# Altium PCB UpperPlumbingBayBoard.PcbDoc
Units mil, origin at the board's own origin, x right, y up, seen from the top; angles counter-clockwise.
Board outline 4300 x 4207 mil, 4 copper layers (Top Layer, GND, PWR, Bottom Layer), stack 62.449 mil thick; 60 components, 42 nets, 244 pads, 0 vias.
Unrouted connection lines stored in the file: 149.
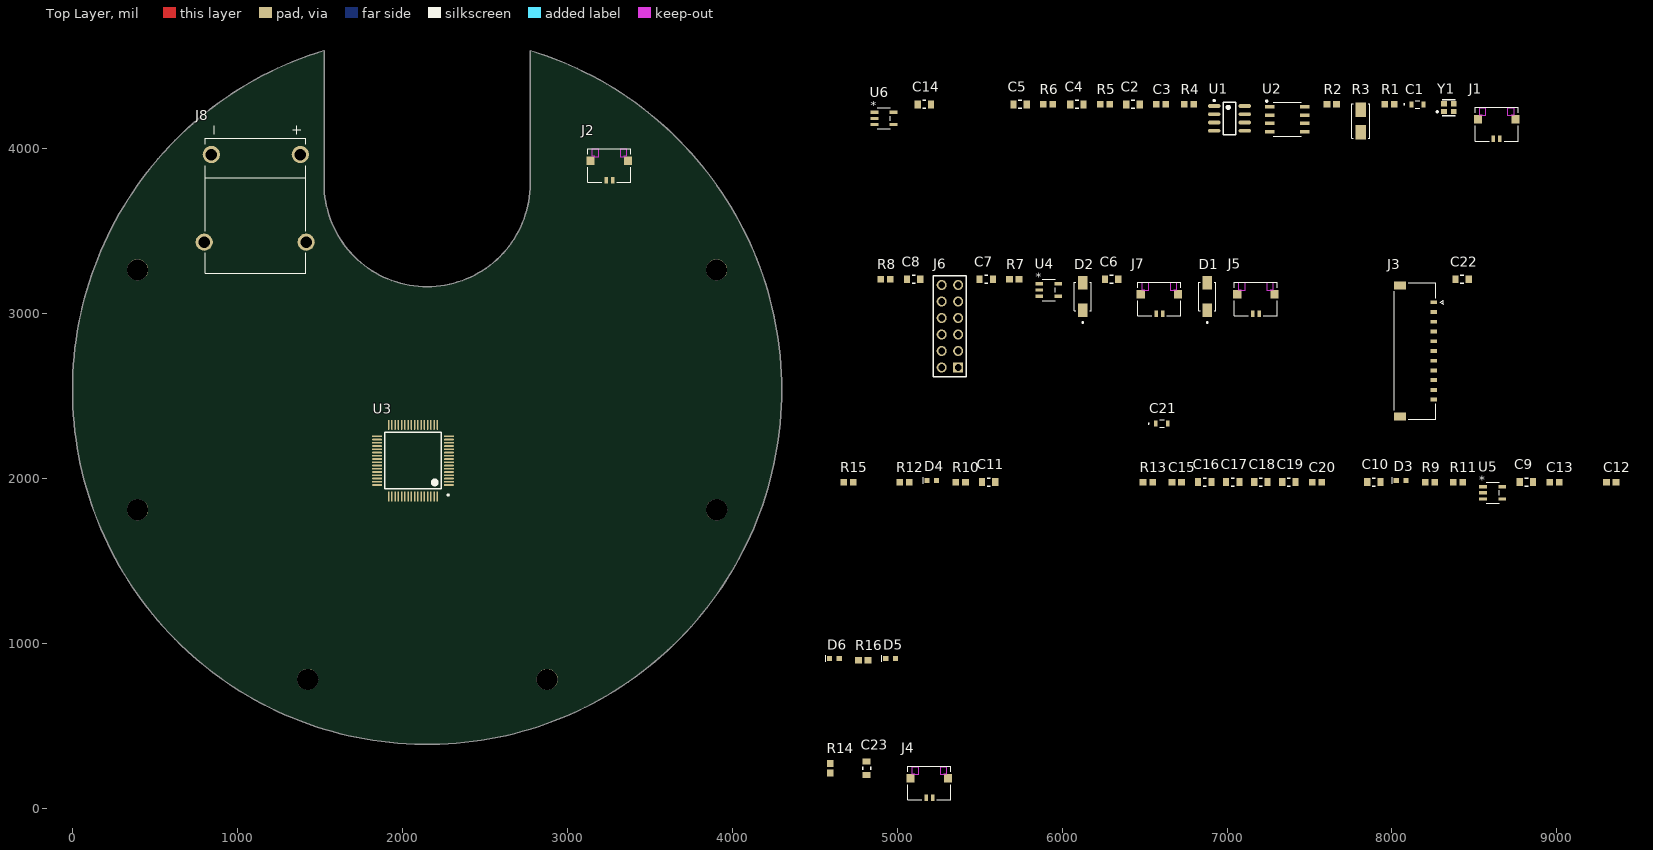
[diagram p0: Top Layer view]
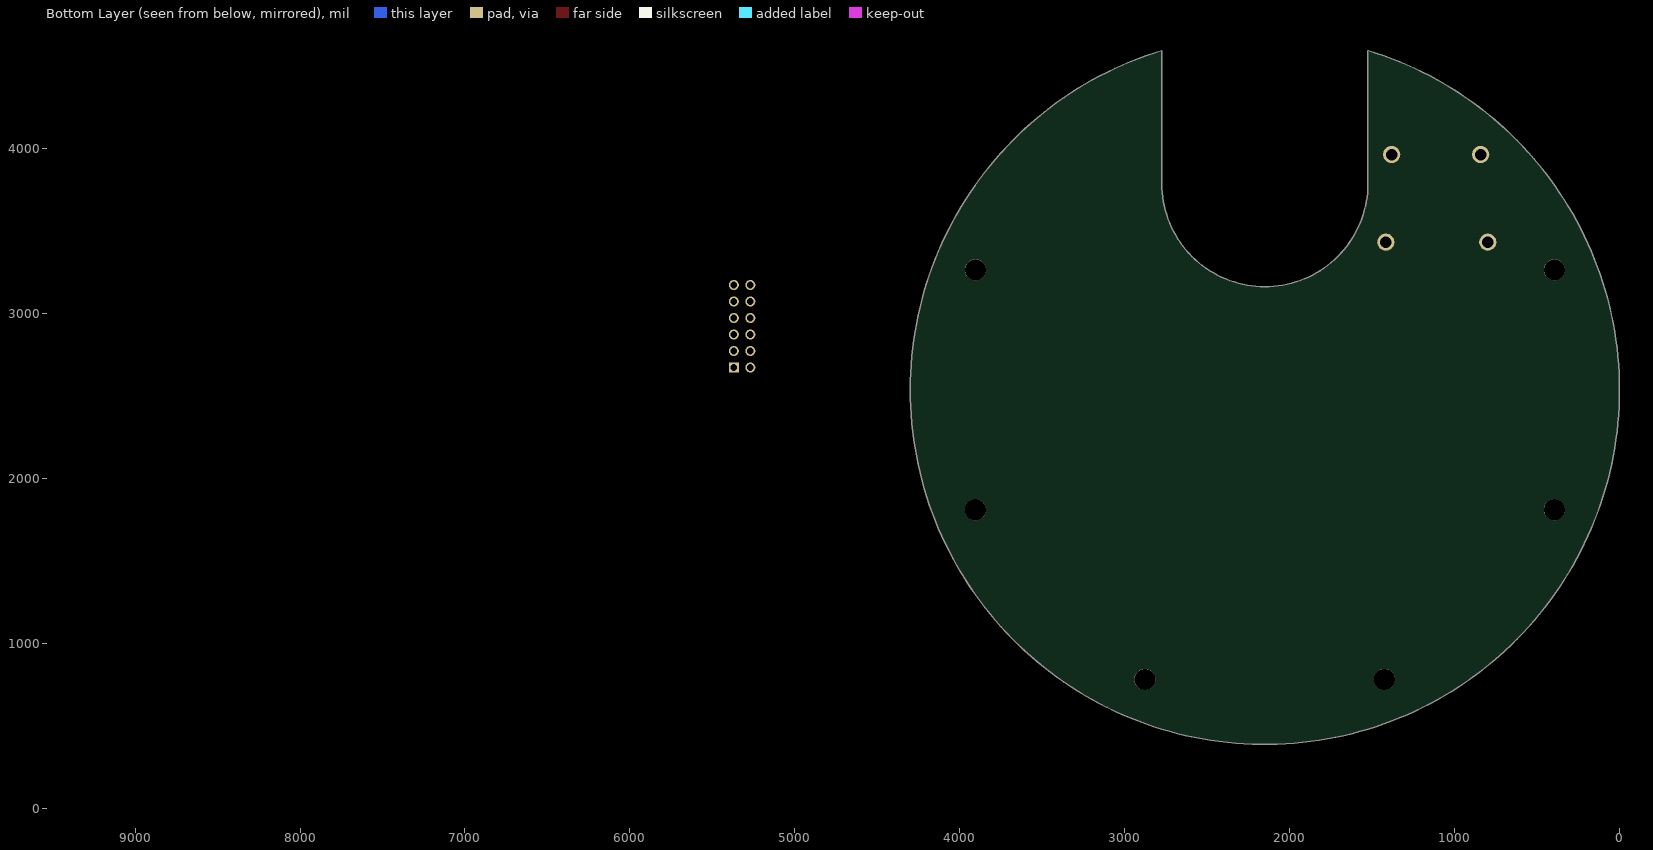
[diagram p1: Bottom Layer view, seen from below]

## Layer stack, top to bottom
Top Solder: solder mask 0.5, Solder Resist, Dk 3.8
Top Layer: signal copper 1.378
Dielectric 1: prepreg 8.2835, 7628, Dk 4.4
GND: signal copper 0.5984
Core: core 41.9291, FR-4, Dk 4.6
PWR: signal copper 0.5984
Dielectric 2: prepreg 8.2835, 7628, Dk 4.4
Bottom Layer: signal copper 1.378
Bottom Solder: solder mask 0.5, Solder Resist, Dk 3.8

## Board outline
1525.5,4596.66 ccw(c2150.5,2539.5) 2775.5,4596.66 2775.5,3789.5 cw(c2150.5,3789.5) 1525.5,3789.5

## Design rules (kind name [scope] priority, off if disabled: settings)
BoardOutlineClearance [All] p1: gap=7.87 ignorepadtopadclearanceinfootprint=FALSE
Clearance [All] p1: gap=7.87 ignorepadtopadclearanceinfootprint=TRUE
ComponentClearance [All] p1: gap=4 collisioncheckmode=3 verticalgap=4 showdistances=TRUE
DiffPairsRouting [All] p1: maxlimit=10 minlimit=10 mostfreqgap=10 toplayer_minwidth=15 toplayer_maxwidth=15 toplayer_prefwidth=15 midlayer1_minwidth=15 midlayer1_maxwidth=15 midlayer1_prefwidth=15 midlayer2_minwidth=15 midlayer2_maxwidth=15 midlayer2_prefwidth=15 bottomlayer_minwidth=15 bottomlayer_maxwidth=15 bottomlayer_prefwidth=15 maxuncoupledlength=500
Height [All] p1: minheight=0 maxheight=71497.94 prefheight=500
HoleSize [All] p1: absolutevalues=TRUE maxlimit=248.03 minlimit=7.87 maxpercent=80.000 minpercent=20.000
HoleToHoleClearance [All] p1: gap=9.84 allowstackedmicrovias=FALSE
MinimumAnnularRing [All] p1: minimumring=3
MinimumSolderMaskSliver [All] p1: minsoldermaskwidth=0
PlaneClearance [All] p1: clearance=4
PlaneConnect PlaneConnectPowerPads [InPadClass('PowerPads')] p1: planeconnectstyle=Direct reliefexpansion=20 reliefentries=4 reliefconductorwidth=10 reliefairgap=10
PlaneConnect [All] p2: pad.planeconnectstyle=Relief pad.reliefexpansion=11.81 pad.reliefentries=4 pad.reliefconductorwidth=4 pad.reliefairgap=4 via.planeconnectstyle=Direct via.reliefexpansion=11.81 via.reliefentries=4 via.reliefconductorwidth=5 via.reliefairgap=5
PolygonConnect Vent_Pwr [InNet('VENT_PWR')] p1: thpad.connectstyle=Relief thpad.reliefconductorwidth=10 thpad.reliefentries=4 thpad.polygonreliefangle="90 Angle" thpad.airgapwidth=10 smdpad.connectstyle=Relief smdpad.reliefconductorwidth=10 smdpad.reliefentries=4 smdpad.polygonreliefangle="90 Angle" smdpad.airgapwidth=10 via.connectstyle=Direct via.reliefconductorwidth=10 via.reliefentries=4 via.polygonreliefangle="90 Angle" via.airgapwidth=10
PolygonConnect "Top Layer 5V" [InNet('+5V')] p2: thpad.connectstyle=Relief thpad.reliefconductorwidth=10 thpad.reliefentries=4 thpad.polygonreliefangle="90 Angle" thpad.airgapwidth=10 smdpad.connectstyle=Relief smdpad.reliefconductorwidth=10 smdpad.reliefentries=4 smdpad.polygonreliefangle="90 Angle" smdpad.airgapwidth=10 via.connectstyle=Direct via.reliefconductorwidth=10 via.reliefentries=4 via.polygonreliefangle="90 Angle" via.airgapwidth=10
PolygonConnect ServoPower [InNet('SERVO_PWR')] p3: thpad.connectstyle=Relief thpad.reliefconductorwidth=10 thpad.reliefentries=4 thpad.polygonreliefangle="90 Angle" thpad.airgapwidth=10 smdpad.connectstyle=Relief smdpad.reliefconductorwidth=10 smdpad.reliefentries=4 smdpad.polygonreliefangle="90 Angle" smdpad.airgapwidth=10 via.connectstyle=Direct via.reliefconductorwidth=10 via.reliefentries=4 via.polygonreliefangle="90 Angle" via.airgapwidth=10
PolygonConnect VentPower [InNet('VENT_PWR')] p4: thpad.connectstyle=Direct thpad.reliefconductorwidth=10 thpad.reliefentries=4 thpad.polygonreliefangle="90 Angle" thpad.airgapwidth=10 smdpad.connectstyle=Relief smdpad.reliefconductorwidth=10 smdpad.reliefentries=4 smdpad.polygonreliefangle="90 Angle" smdpad.airgapwidth=10 via.connectstyle=Direct via.reliefconductorwidth=10 via.reliefentries=4 via.polygonreliefangle="90 Angle" via.airgapwidth=10
PolygonConnect Power12V [InNet('+12')] p5: thpad.connectstyle=Relief thpad.reliefconductorwidth=10 thpad.reliefentries=4 thpad.polygonreliefangle="90 Angle" thpad.airgapwidth=10 smdpad.connectstyle=Relief smdpad.reliefconductorwidth=10 smdpad.reliefentries=4 smdpad.polygonreliefangle="90 Angle" smdpad.airgapwidth=10 via.connectstyle=Direct via.reliefconductorwidth=10 via.reliefentries=4 via.polygonreliefangle="90 Angle" via.airgapwidth=10
PolygonConnect DrainPower [InNet('DRAIN_PWR')] p6: thpad.connectstyle=Relief thpad.reliefconductorwidth=10 thpad.reliefentries=4 thpad.polygonreliefangle="90 Angle" thpad.airgapwidth=10 smdpad.connectstyle=Relief smdpad.reliefconductorwidth=10 smdpad.reliefentries=4 smdpad.polygonreliefangle="90 Angle" smdpad.airgapwidth=10 via.connectstyle=Direct via.reliefconductorwidth=10 via.reliefentries=4 via.polygonreliefangle="90 Angle" via.airgapwidth=10
PolygonConnect Servo12V [InNet('SERVO_12V')] p7: thpad.connectstyle=Relief thpad.reliefconductorwidth=10 thpad.reliefentries=4 thpad.polygonreliefangle="90 Angle" thpad.airgapwidth=10 smdpad.connectstyle=Relief smdpad.reliefconductorwidth=10 smdpad.reliefentries=4 smdpad.polygonreliefangle="90 Angle" smdpad.airgapwidth=10 via.connectstyle=Direct via.reliefconductorwidth=10 via.reliefentries=4 via.polygonreliefangle="90 Angle" via.airgapwidth=10
PolygonConnect PowerConnectionServo [InNet('SERVO_12V')] p8: connectstyle=Relief reliefconductorwidth=10 reliefentries=4 polygonreliefangle="90 Angle" airgapwidth=10
PolygonConnect PowerConnectionGND [InNet('GND')] p9: thpad.connectstyle=Relief thpad.reliefconductorwidth=10 thpad.reliefentries=4 thpad.polygonreliefangle="90 Angle" thpad.airgapwidth=10 smdpad.connectstyle=Relief smdpad.reliefconductorwidth=10 smdpad.reliefentries=4 smdpad.polygonreliefangle="90 Angle" smdpad.airgapwidth=10 via.connectstyle=Direct via.reliefconductorwidth=10 via.reliefentries=4 via.polygonreliefangle="90 Angle" via.airgapwidth=10
PolygonConnect PowerConnection5V [InNet('+5V')] p10: connectstyle=Relief reliefconductorwidth=10 reliefentries=4 polygonreliefangle="90 Angle" airgapwidth=10
PolygonConnect TOP_3V3 [InNet('+3V3')] p11: thpad.connectstyle=Relief thpad.reliefconductorwidth=10 thpad.reliefentries=4 thpad.polygonreliefangle="90 Angle" thpad.airgapwidth=10 smdpad.connectstyle=Relief smdpad.reliefconductorwidth=10 smdpad.reliefentries=4 smdpad.polygonreliefangle="90 Angle" smdpad.airgapwidth=7.87 via.connectstyle=Direct via.reliefconductorwidth=10 via.reliefentries=4 via.polygonreliefangle="90 Angle" via.airgapwidth=10
PolygonConnect Oscillator [InNet('NetC6_2')] p12: thpad.connectstyle=Relief thpad.reliefconductorwidth=10 thpad.reliefentries=4 thpad.polygonreliefangle="90 Angle" thpad.airgapwidth=10 smdpad.connectstyle=Relief smdpad.reliefconductorwidth=10 smdpad.reliefentries=4 smdpad.polygonreliefangle="90 Angle" smdpad.airgapwidth=10 via.connectstyle=Direct via.reliefconductorwidth=10 via.reliefentries=4 via.polygonreliefangle="90 Angle" via.airgapwidth=10
RoutingVias [All] p1: holewidth=11.81 width=23.62 viastyle="Through Hole" minholewidth=7.87 minwidth=17.72 maxholewidth=248.03 maxwidth=257.87
SilkToSilkClearance [All] p1: silktosilkclearance=0
SilkToSolderMaskClearance [IsPad] p1: minsilkscreentomaskgap=4 clearancetoexposedcopper=TRUE
SolderMaskExpansion [All] p1: expansion=2.95 istentingtop=FALSE
SupplyNets "Schematic Supply Nets_2" [InNet('+12')] p1: voltage=0.000
SupplyNets "Schematic Supply Nets_1" [InNet('GND')] p2: voltage=0.000
SupplyNets "Schematic Supply Nets" [InNet('+3V3')] p3: voltage=0.000
UnRoutedNet [All] p1: checkbadconnections=TRUE
Width [All] p1: maxlimit=39.37 minlimit=7.87 preferedwidth=11.81 minimp=50.000000 maximp=50.000000 favimp=50.000000
19 further rules are at their usual default settings.

## Classes and differential pairs
component class UpperPlumbingBayBoardSchematic: C1 C2 C3 C4 C5 C6 C7 C9 C12 C14 C15 C16 C17 C18 C19 C20 C21 C23 D1 D2 J1 J2 J4 J5 J6 J8 R1 R2 R3 R4 R5 R6 R7 R8 R11 R13 R15 R16 U1 U2 U3 U6 Y1
differential pair TX: +TX_P -TX_N
differential pair RX: +RX_P -RX_N

## Components (designator, comment, footprint, x,y, rotation, side; value= is the part's Value field where it differs from the comment)
C1 "CGA3E2X7R1H103K080AA" 10000pF-CAP_1608_TDK 8155,4270 r0 top
C2 "CGA3E2X7R1E104K080AA" 0.1uF-FP-CGA3E-0_3-0_1-IPC_A 6430,4270 r0 top
C3 "CL10A105KP8NNNC" 0603 6600,4270 r0 top
C4 "CGA3E2X7R1E104K080AA" 0.1uF-FP-CGA3E-0_3-0_1-IPC_A 6090,4270 r0 top
C5 "CGA3E2X7R1E104K080AA" 0.1uF-FP-CGA3E-0_3-0_1-IPC_A 5745,4270 r0 top
C6 "CGA3E2X7R1E104K080AA" 0.1uF-FP-CGA3E-0_3-0_1-IPC_A 6300,3210 r0 top
C7 "CC0603KPX7R9BB332" 0.1uF-FP-CGA3E-0_3-0_1-IPC_A 5540,3210 r0 top
C8 "CGA3E2X7R1E104K080AA" 0.1uF-FP-CGA3E-0_3-0_1-IPC_A 5100,3210 r0 top
C9 "CGA3E2X7R1E104K080AA" 0.1uF-FP-CGA3E-0_3-0_1-IPC_A 8815,1980 r0 top
C10 "CC0603KPX7R9BB332" 0.1uF-FP-CGA3E-0_3-0_1-IPC_A 7890,1980 r0 top
C11 "CGA3E2X7R1E104K080AA" 0.1uF-FP-CGA3E-0_3-0_1-IPC_A 5555,1980 r0 top
C12 "C1608X5R1C225K080AB" 0603 9330,1980 r0 top
C13 "C1608X5R1C225K080AB" 0603 8985,1980 r0 top
C14 "CGA3E2X7R1E104K080AA" 0.1uF-FP-CGA3E-0_3-0_1-IPC_A 5165,4270 r0 top
C15 "CL10A106MP8NNNC" 0603 6695,1980 r0 top
C16 "CGA3E2X7R1E104K080AA" 0.1uF-FP-CGA3E-0_3-0_1-IPC_A 6865,1980 r0 top
C17 "CGA3E2X7R1E104K080AA" 0.1uF-FP-CGA3E-0_3-0_1-IPC_A 7035,1980 r0 top
C18 "CGA3E2X7R1E104K080AA" 0.1uF-FP-CGA3E-0_3-0_1-IPC_A 7205,1980 r0 top
C19 "CGA3E2X7R1E104K080AA" 0.1uF-FP-CGA3E-0_3-0_1-IPC_A 7375,1980 r0 top
C20 "CL10A105KP8NNNC" 0603 7545,1980 r0 top
C21 "CGA3E2X7R1H103K080AA" 10000pF-CAP_1608_TDK 6605,2335 r0 top
C22 "CC0603KPX7R9BB332" 0.1uF-FP-CGA3E-0_3-0_1-IPC_A 8425,3210 r0 top
C23 "CGA3E2X7R1E104K080AA" 0.1uF-FP-CGA3E-0_3-0_1-IPC_A 4815,245 r90 top
D1 "SS14" DIOM4325X250N 6880,3105 r90 top
D2 "SS14" DIOM4325X250N 6125,3105 r90 top
D3 "LTST-C191KGKT" LTST-C191KGKT 8055,1990 r0 top
D4 "LTST-C191KGKT" LTST-C191KGKT 5210,1990 r0 top
D5 "LTST-C191KGKT" LTST-C191KGKT 4960,910 r0 top
D6 "LTST-C191KGKT" LTST-C191KGKT 4620,910 r0 top
J1 "5037630291" 2MOLEX_5037630291 8635,4150 r0 top
J2 "5037630291" 2MOLEX_5037630291 3255,3900 r0 top
J3 "5040501191" MOLEX_5040501191 8140,2775 r90 top (schematic designator J6)
J4 "5037630291" 2MOLEX_5037630291 5195,155 r0 top
J5 "5037630291" 2MOLEX_5037630291 7175,3090 r0 top
J6 "TSW-106-07-G-D" SMTC-TSW-106-07-X-D 5370,2675 r90 top (schematic designator J7)
J7 "5037630291" 2MOLEX_5037630291 6590,3090 r0 top
J8 "PCC-SMP-K-5" OMEGA_PCC-SMP-K-5 1110,3655 r270 top
R1 "0603 10 kOhm" 0603 7985,4270 r0 top
R2 "ERJ-3EKF38R3V" 0603 7635,4270 r0 top
R3 "PWR2010W5R00JE" BO_PWR2010 7810,4170 r90 top
R4 "90R" 0603 6770,4270 r0 top
R5 "0R" 0603 6260,4270 r0 top
R6 "0R" 0603 5915,4270 r0 top
R7 "15 Ohm" 0603 5710,3210 r0 top
R8 "ERA-3AED1650V" 0603 4930,3210 r0 top
R9 "15 Ohm" 0603 8230,1980 r0 top
R10 "ERA-3AED1650V" 0603 5385,1980 r0 top
R11 "RC0603FR-071KL" 0603 8400,1980 r0 top
R12 "15 Ohm" 0603 5045,1980 r0 top
R13 "RC0603FR-071KL" 0603 6520,1980 r0 top
R14 "ERA-3AED1650V" 0603 4595,245 r90 top
R15 "330 Ohm" 0603 4705,1980 r0 top
R16 "RC0603FR-071KL" 0603 4795,900 r0 top
U1 "MAX31855KASA+T" MAXM-S8+4_L 7015,4185 r0 top
U2 "SN65HVD1477DR" D8_TEX 7365,4180 r0 top
U3 "STM32F405RGT6" STM-LQFP64_L 2065,2110 r180 top
U4 "TSZ181ILT" SOT23-5_STM-M 5920,3145 r0 top
U5 "TSZ181ILT" SOT23-5_STM-M 8610,1915 r0 top
U6 "TSZ181ILT" SOT23-5_STM-M 4920,4185 r0 top
Y1 "SIT8920BM-73-33N-8.000000" FP-SIT8920BM-73-33N-8_000-MFG 8345,4250 r0 top

## Footprints (in the part's own frame and the unit in brackets; to place one, negate y for a bottom-side part, rotate by r counter-clockwise, add the part's x,y. Pads: shape width x height; smd on the part's side, far side on the other; paste and mask are expansions set on the pad)
0.1uF-FP-CGA3E-0_3-0_1-IPC_A [mm]
  rect 0.956x1.206 smd paste+0 mask+0: 1(-1.025,0) 2(1.025,0)
  silkscreen extent -0.25,-0.6 0.25,0.6, body extent -2,-1.1 2,1.1, height 0.25
2MOLEX_5037630291 [mm]
  rect 0.55x1 smd mask+0.076: 1(0.5,-2.265) 2(-0.5,-2.265)
  rect 1.26x1.3 smd mask+0.076: S1(2.875,0.725) S2(-2.875,0.725)
  Top Layer keep-out region: 2.605,1.38 2.24,1.38 2.24,1.295 1.735,1.295 1.735,2.545 2.605,2.545
  Top Layer keep-out region: -1.735,1.295 -2.24,1.295 -2.24,1.38 -2.605,1.38 -2.605,2.545 -1.735,2.545
  silkscreen extent -3.3,-2.6 3.3,2.6, body extent -3.3,-2.59 3.3,2.6, height 1.42
0603 [mm]
  rect 1.04x1.02 smd: 1(-0.735,0) 2(0.735,0)
  body extent -0.8,-0.4 0.8,0.4, height 0.55
10000pF-CAP_1608_TDK [mil]
  rect 22x35 smd paste+0 mask+0: 1(-36.5,0) 2(36.5,0)
  silkscreen extent -83,-22 13,22, body extent -34,-17 34,17, height 35
BO_PWR2010 [mm]
  rect 2.25x1.651 smd paste+0 mask+0: 1(-1.73,0) 2(1.73,0)
  silkscreen extent -2.67,-1.4 2.67,1.4, body extent -2.54,-1.27 2.54,1.27, height 3.25
D8_TEX [mil]
  rect 57.5x22 smd paste+0 mask+0: 1(-107.25,75) 2(-107.25,25) 3(-107.25,-25) 4(-107.25,-75) 5(107.25,-75) 6(107.25,-25) 7(107.25,25) 8(107.25,75)
  silkscreen extent -130,-104 84,115, body extent -122,-99 122,99, height 69
DIOM4325X250N [mm]
  rect 2.12x1.5 smd: A(2.115,0) C(-2.115,0)
  silkscreen extent -4.1,-1.28 2.16,1.28, body extent -2.57,-1.29 2.57,1.27, height 2.5
FP-SIT8920BM-73-33N-8_000-MFG [mm]
  rect 0.9x0.8 smd paste+0 mask+0: 1(-0.75,-0.6) 2(0.75,-0.6) 3(0.75,0.6) 4(-0.75,0.6)
  silkscreen extent -1.92,-1.25 1,1.25, body extent -1.3,-1.1 1.3,1.1, height 0.25
LTST-C191KGKT [mm] "Green 571nm LED Indication - Discrete 2V 0603"
  rect 0.8x0.8 smd paste-3 mask+0.05: 1(-0.75,0) 2(0.75,0)
  silkscreen extent -1.35,-0.5 -1.35,0.5, body extent -0.8,-0.4 0.8,0.4, height 0.8
MAXM-S8+4_L [mm] "SOIC, 8-Leads, Body 4.9x3.9mm, Pitch 1.27mm, IPC High Density"
  oval 1.9x0.6 smd: U1(-2.35,1.905) U2(-2.35,0.635) U3(-2.35,-0.635) U4(-2.35,-1.905) U5(2.35,-1.905) U6(2.35,-0.635) U7(2.35,0.635) U8(2.35,1.905)
  silkscreen extent -2.47,-2.5 1,2.88, body extent -2,-2.5 2,2.5, height 1.75
MOLEX_5040501191 [mm]
  rect 0.6x1 smd mask+0.076: 1(7.5,-2.87) 2(6,-2.87) 3(4.5,-2.87) 4(3,-2.87) 5(1.5,-2.87) 6(0,-2.87) 7(-1.5,-2.87) 8(-3,-2.87) 9(-4.5,-2.87) 10(-6,-2.87) 11(-7.5,-2.87)
  rect 1.25x1.8 smd mask+0.076: S1(10.105,2.32) S2(-10.105,2.32)
  silkscreen extent -10.53,-4.37 10.53,3.22, body extent -10.53,-3.22 10.53,3.22, height 2
OMEGA_PCC-SMP-K-5 [mm]
  round 2.655 hole 1.77: N(-7.9,-6.8) P(-7.9,6.9) S1(5.6,7.8) S2(5.6,-7.9)
  silkscreen extent -12.33,-7.75 10.4,7.75, body extent -10.4,-8.05 10.4,8.05, height 6.6
SMTC-TSW-106-07-X-D [mm] ".025 SQ Post Terminal Strip Assembly, 2x6 Pins, Vertical, 2.54mm Pitch, Male"
  rect 1.55x1.55 hole 1.02: 1(0,0)
  round 1.55 hole 1.02: 2(0,2.54) 3(2.54,0) 4(2.54,2.54) 5(5.08,0) 6(5.08,2.54) 7(7.62,0) 8(7.62,2.54) 9(10.16,0) 10(10.16,2.54) 11(12.7,0) 12(12.7,2.54)
  silkscreen extent -1.46,-1.27 14.16,3.81, body extent -1.27,-1.27 13.97,3.81, height 8.38
SOT23-5_STM-M [mil]
  rect 46.5x20 smd paste+0 mask+0: 1(-57.75,37.4) 2(-57.75,0) 3(-57.75,-37.4) 4(57.75,-37.4) 5(57.75,37.4)
  silkscreen extent -40,-64 40,64, body extent -59,-59 59,59, height 57
STM-LQFP64_L [mm] "Thin QFP, 64-Leads, Body 10x10mm, Pitch 0.5mm, IPC High Density"
  oval 1.55x0.25 smd: 1(-5.525,3.75) 2(-5.525,3.25) 3(-5.525,2.75) 4(-5.525,2.25) 5(-5.525,1.75) 6(-5.525,1.25) 7(-5.525,0.75) 8(-5.525,0.25) 9(-5.525,-0.25) 10(-5.525,-0.75) 11(-5.525,-1.25) 12(-5.525,-1.75) 13(-5.525,-2.25) 14(-5.525,-2.75) 15(-5.525,-3.25) 16(-5.525,-3.75) 33(5.525,-3.75) 34(5.525,-3.25) 35(5.525,-2.75) 36(5.525,-2.25) 37(5.525,-1.75) 38(5.525,-1.25) 39(5.525,-0.75) 40(5.525,-0.25) 41(5.525,0.25) 42(5.525,0.75) 43(5.525,1.25) 44(5.525,1.75) 45(5.525,2.25) 46(5.525,2.75) 47(5.525,3.25) 48(5.525,3.75)
  oval 0.25x1.55 smd: 17(-3.75,-5.525) 18(-3.25,-5.525) 19(-2.75,-5.525) 20(-2.25,-5.525) 21(-1.75,-5.525) 22(-1.25,-5.525) 23(-0.75,-5.525) 24(-0.25,-5.525) 25(0.25,-5.525) 26(0.75,-5.525) 27(1.25,-5.525) 28(1.75,-5.525) 29(2.25,-5.525) 30(2.75,-5.525) 31(3.25,-5.525) 32(3.75,-5.525) 49(3.75,5.525) 50(3.25,5.525) 51(2.75,5.525) 52(2.25,5.525) 53(1.75,5.525) 54(1.25,5.525) 55(0.75,5.525) 56(0.25,5.525) 57(-0.25,5.525) 58(-0.75,5.525) 59(-1.25,5.525) 60(-1.75,5.525) 61(-2.25,5.525) 62(-2.75,5.525) 63(-3.25,5.525) 64(-3.75,5.525)
  silkscreen extent -5.54,-4.35 4.35,5.41, body extent -5,-5 5,5, height 1.6

## Part data
C1 C21: "CAP CER 10000PF 50V X7R 0603", Capacitance=10000pF, Manufacturer="TDK Corporation", Operating Temperature="-55°C ~ 125°C", Package / Case="0603 (1608 Metric)", Supplier Part Number 1=445-5662-1-ND, Temperature Coefficient=X7R, Tolerance=±10%, Voltage - Rated=50V, ComponentLink1description=Datasheet, ComponentLink1URL=https://product.tdk.com/info/en/catalog/spec/mlccspec_automotive_general_en.pdf, Manufacturer Part Number=CGA3E2X7R1H103K080AA, Mounting Type="Surface Mount, MLCC", Size / Dimension="0.063\" L x 0.031\" W (1.60mm x 0.80mm)", Supplier 1=Digi-Key, Thickness (Max)="0.035\" (0.90mm)"
C2 C4 C5 C6 C8 C9 C11 C14 C16 C17 C18 C19 C23: "CAP CER 0.1UF 25V X7R 0603", Capacitance=0.1µF, Manufacturer="TDK Corporation", Operating Temperature="-55°C ~ 125°C", Package / Case="0603 (1608 Metric)", Supplier Part Number 1=445-5667-1-ND, Temperature Coefficient=X7R, Tolerance=±10%, Voltage - Rated=25V, ComponentLink1description=Datasheet, ComponentLink1URL=https://product.tdk.com/info/en/catalog/spec/mlccspec_automotive_general_en.pdf, Manufacturer Part Number=CGA3E2X7R1E104K080AA, Mounting Type="Surface Mount, MLCC", Size / Dimension="0.063\" L x 0.031\" W (1.60mm x 0.80mm)", Supplier 1=Digi-Key, Thickness (Max)="0.035\" (0.90mm)"
C3 C20: "CAP CER 1UF 10V X5R 0603", Capacitance=1uF, Manufacturer="Samsung Electro-Mechanics", Operating Temperature="-55°C ~ 85°C", Package / Case="0603 (1608 Metric)", Supplier Part Number 1=1276-1182-1-ND, Temperature Coefficient=X5R, Tolerance=±10%, Voltage - Rated=10V, ComponentLink1description=Datasheet, ComponentLink1URL=http://www.samsungsem.com/kr/support/product-search/mlcc/__icsFiles/afieldfile/2019/05/10/19-CL10A105KP8NNNC.pdf, Manufacturer Part Number=CL10A105KP8NNNC, Mounting Type="Surface Mount, MLCC", Size / Dimension="0.063\" L x 0.031\" W (1.60mm x 0.80mm)", Supplier 1=Digi-Key, Thickness (Max)="0.035\" (0.90mm)"
C7 C10 C22: library part CGA3E2X7R1E104K080AA, "CAP CER 0.1UF 25V X7R 0603", Capacitance=0.1µF, Manufacturer="TDK Corporation", Operating Temperature="-55°C ~ 125°C", Package / Case="0603 (1608 Metric)", Supplier Part Number 1=445-5667-1-ND, Temperature Coefficient=X7R, Tolerance=±10%, Voltage - Rated=25V, ComponentLink1description=Datasheet, ComponentLink1URL=https://product.tdk.com/info/en/catalog/spec/mlccspec_automotive_general_en.pdf, Manufacturer Part Number=CGA3E2X7R1E104K080AA, Mounting Type="Surface Mount, MLCC", Size / Dimension="0.063\" L x 0.031\" W (1.60mm x 0.80mm)", Supplier 1=Digi-Key, Thickness (Max)="0.035\" (0.90mm)"
C12 C13: "CAP CER 2.2UF 16V X5R 0603", Capacitance=2.2uF, Manufacturer="TDK Corporation", Operating Temperature="-55°C ~ 85°C", Package / Case="0603 (1608 Metric)", Supplier Part Number 1=445-5157-1-ND, Temperature Coefficient=X5R, Tolerance=±10%, Voltage - Rated=16V, ComponentLink1description=Datasheet, ComponentLink1URL=https://product.tdk.com/info/en/catalog/spec/mlccspec_commercial_general_midvoltage_en.pdf, Manufacturer Part Number=C1608X5R1C225K080AB, Mounting Type="Surface Mount, MLCC", Size / Dimension="0.063\" L x 0.031\" W (1.60mm x 0.80mm)", Supplier 1=Digi-Key, Thickness (Max)="0.035\" (0.90mm)"
C15: "CAP CER 10UF 10V X5R 0603", Capacitance=10µF, Manufacturer="Samsung Electro-Mechanics", Operating Temperature="-55°C ~ 85°C", Package / Case="0603 (1608 Metric)", Supplier Part Number 1=1276-1871-1-ND, Temperature Coefficient=X5R, Tolerance=±20%, Voltage - Rated=10V, ComponentLink1description=Datasheet, ComponentLink1URL=https://static6.arrow.com/aropdfconversion/f91a1722e2705c3d73cfb1979021b64ae4055093/19-cl10a106mp8nnnc.pdf, Manufacturer Part Number=CL10A106MP8NNNC, Mounting Type="Surface Mount, MLCC", Size / Dimension="0.063\" L x 0.031\" W (1.60mm x 0.80mm)", Supplier 1=Digi-Key, Thickness (Max)="0.035\" (0.90mm)"
D1 D2 J1 J2 J3 J4 J5 J7: Package=None, Availability=Unavailable, Price=None
  D1 D2: MP=SS14
  J1 J2 J4 J5 J7: MP=5037630291
  J3: MP=5040501191
D3 D4 D5 D6: "LED,  LTST-C191KGKT", Case Code (Imperial)=0603, Case Code (Metric)=1608, Color=Green, Forward Voltage=2V, Lens Color=Colorless, Manufacturer="Vishay Lite-On", Max Operating Temperature=85°C, Max Power Dissipation=75mW, Min Operating Temperature=-55°C, Test Current=20mA, Case/Package=0603, Category=Uncategorized, ComponentLink1description=https://datasheet.ciiva.com/2109/ltst-c191kgkt-2109973.pdf?src-supplier=Digi-Key, ComponentLink1URL=https://datasheet.ciiva.com/2109/ltst-c191kgkt-2109973.pdf?src-supplier=Digi-Key, Dominant Wavelength=571nm, Height=0.65mm, Lead Free="Lead Free", Length=1.6mm, Lens Size=0.8mm, Lens Style=Flat,Rectangular,Colorless, Lens Transparency=Clear, Luminous Intensity=35mcd, Manufacturer Part Number=LTST-C191KGKT, Mount="Surface Mount", Number of LEDs=1, Number of Pins=2, Packaging="Tape and Reel", Pricing="1=0.223, 10=0.1424, 25=0.1365, 100=0.0663, 250=0.0656, 500=0.0612, 1000=0.0451, 2000=0.0464, 3000=0.0448, 5000=0.0403, 10000=0.0363, 25000=0.0323, 50000=0.0316 (USD)", RoHS=Yes, RoHS Compliant=Yes, Series=-, Stock=3111, Supplier 1="Arrow Electronics", Supplier Part Number 1=LTST-C191KGKT, Viewing Angle=130°, Wavelength=574nm, Width=0.8mm
J6: library part SMTC-TSW-106-07-X-D_1, "0.025\" SQ Post Header, Through-hole, Vertical, -55 to 125 degC, 2.54 mm Pitch, 12-Pin, Male, RoHS", Manufacturer=Samtec, Temperature Range="-55 to 125 degC", ComponentLink1description="Manufacturer URL", ComponentLink1URL=http://www.samtec.com, ComponentLink2description=Datasheet, ComponentLink2URL=http://www.samtec.com/documents/webfiles/pdf/TSW_TH.PDF, ComponentLink3Description="Package Specification", ComponentLink3URL=http://www.samtec.com/documents/webfiles/cpdf/TSW-XXX-XX-XXX-X-XX-XXX-MKT.pdf, DatasheetVersion=F-214, Mounting Technology=Through-hole, Orientation=Vertical, PackageDescription=".025[0.64] SQ. Post Terminal Strip Assembly", PackageReference=TSW-106-07-X-D, PackageVersion="DM, 8/1988", PartNumber=TSW-106-07-G-D, Pitch="2.54 mm", RoHS=True
J8: "Thermocouple Conn, K Type, Rcpt, Pk 5", Package=None, Availability="No availability data", Check_prices=https://www.snapeda.com/parts/PCC-SMP-K-5/Omega%20Engineering/view-part/2886965/?ref=eda, MF="Omega Engineering", MP=PCC-SMP-K-5, Price=None, SnapEDA_Link=https://www.snapeda.com/parts/PCC-SMP-K-5/Omega%20Engineering/view-part/2886965/?ref=snap
R1: library part ERJ-3GEYJ103V, "ERJ-3GEYJ103V /  / SMD Chip Resistor, 10 kOhm, ï¿½ 5%, 100 mW, 0603 [1608 Metric], Thick Film, General Purpose", Manufacturer="Panasonic Electronic Components", Operating Temperature="-55°C ~ 155°C", Package="0603 (1608 Metric)", Power  (W)=0.1W, Resistance=10K, Supplier Part Number 1=P10KGCT-ND, Temperature Coefficient=±200ppm/°C, Tolerance=±5%, ComponentLink1description=Datasheet, ComponentLink1URL=https://industrial.panasonic.com/cdbs/www-data/pdf/RDA0000/DMA0000COL11.pdf, ComponentLink2description="Land Pattern", ComponentLink2URL=https://industrial.panasonic.com/cdbs/www-data/pdf/RDA0000/DMA0000COL17.pdf, Composition="Thick Film", Manufacturer Part Number=ERJ-3GEYJ103V, Supplier 1=Digi-Key
R2: "Res Thick Film 0603 38.3 Ohm 1% 1/10W ±100ppm/°C Molded SMD Punched Carrier T/R", Case Code (Imperial)=0603, Case Code (Metric)=1608, Manufacturer=Panasonic, Max Operating Temperature=155°C, Max Power Dissipation=100mW, Min Operating Temperature=-55°C, Package Quantity=1, Resistance=38.3R, Resistance Tolerance=1%, Resistor Type="Thick Film", Supplier Part Number 1=01AC1806, Temperature Coefficient=100ppm/°C, Voltage Rating=75V, Voltage Rating (DC)=50V, Case/Package=0603, Category="Chip SMD Resistors", ComponentLink1description=https://datasheet.ciiva.com/22760/1678782-22760701.pdf?src-supplier=Farnell, ComponentLink1URL=https://datasheet.ciiva.com/22760/1678782-22760701.pdf?src-supplier=Farnell, ComponentLink2description=https://datasheet.ciiva.com/22741/1678782-22741961.pdf?src-supplier=Element14, ComponentLink2URL=https://datasheet.ciiva.com/22741/1678782-22741961.pdf?src-supplier=Element14, ComponentLink3Description=https://datasheet.ciiva.com/24165/aoa0000ce2-24165276.pdf?src-supplier=Mouser, ComponentLink3URL=https://datasheet.ciiva.com/24165/aoa0000ce2-24165276.pdf?src-supplier=Mouser, Construction=Rectangular, Contact Plating=Tin, Depth=0.8mm, Features="Automotive AEC-Q200", Height=0.022inch, Lead Free="Lead Free", Length=0.063inch, Manufacturer Part Number=ERJ-3EKF38R3V, Military Standard=Not, Mount="Surface Mount", Number of Terminations=2, Packaging="Tape and Reel", Power Rating=100mW, Pricing="10=0.04200, 25=0.03500, 50=0.02700, 100=0.01800 (CAD)", Reach SVHC Compliant=Yes, RoHS=Yes, RoHS Compliant=Yes, Series=ERJ, Stock=83770, Supplier 1=Newark, Termination=SMD/SMT, Tolerance=1%, Weight=7.1E-05oz, Width=0.8mm
R3: "Res Wirewound 2010 5 Ohm 5% 1/2W ±50ppm/°C Molded SMD SMD T/R", Case Code (Imperial)=2010, Case Code (Metric)=5025, Manufacturer=Bourns, Max Operating Temperature=155°C, Max Power Dissipation=500mW, Min Operating Temperature=-55°C, Package Quantity=1, Resistance=5R, Resistance Tolerance=5%, Resistor Type=Wirewound, Supplier Part Number 1=05R8093, Temperature Coefficient=50ppm/°C, Threshold Voltage=1.6V, Case/Package=2010, Category="Chip SMD Resistors", ComponentLink1description=https://datasheet.ciiva.com/7986/1727932-7986277.pdf?src-supplier=Element14, ComponentLink1URL=https://datasheet.ciiva.com/7986/1727932-7986277.pdf?src-supplier=Element14, ComponentLink2description=https://datasheet.ciiva.com/22713/1727932-22713400.pdf?src-supplier=Element14, ComponentLink2URL=https://datasheet.ciiva.com/22713/1727932-22713400.pdf?src-supplier=Element14, ComponentLink3Description=https://datasheet.ciiva.com/9122/pwr2010-9122735.pdf?src-supplier=Avnet, ComponentLink3URL=https://datasheet.ciiva.com/9122/pwr2010-9122735.pdf?src-supplier=Avnet, ComponentLink4Description=https://datasheet.ciiva.com/15865/pwr2010-15865624.pdf?src-supplier=Onlinecomponents.com, ComponentLink4URL=https://datasheet.ciiva.com/15865/pwr2010-15865624.pdf?src-supplier=Onlinecomponents.com, ComponentLink5Description=https://datasheet.ciiva.com/2484/pwr2010-2484257.pdf?src-supplier=Digi-Key, ComponentLink5URL=https://datasheet.ciiva.com/2484/pwr2010-2484257.pdf?src-supplier=Digi-Key, ComponentLink6Description=https://datasheet.ciiva.com/2484/pwr2010-2484258.pdf?src-supplier=Digi-Key, ComponentLink6URL=https://datasheet.ciiva.com/2484/pwr2010-2484258.pdf?src-supplier=Digi-Key, ComponentLink7Description=https://datasheet.ciiva.com/2484/pwr2010-2484256.pdf?src-supplier=Digi-Key, ComponentLink7URL=https://datasheet.ciiva.com/2484/pwr2010-2484256.pdf?src-supplier=Digi-Key, Depth=2.54mm, Height=0.148inch, Length=0.2inch, Manufacturer Part Number=PWR2010W5R00JE, Military Standard=Not, Mount="Surface Mount", Number of Pins=2, Number of Terminations=2, Packaging="Cut Tape", Power Rating=500mW, Pricing="1=0.68700, 10=0.68700, 25=0.68700, 50=0.68700, 100=0.68700, 250=0.68700 (CAD)", Reach SVHC Compliant=Yes, RoHS=Yes, Series=PWR2010, Stock=26, Supplier 1=Newark, Technology="WIRE WOUND", Termination=Solder, Tolerance=5%, Width=0.1inch
R4: library part 120OHM_0.1W_RES_1, "RC0603FR-0790RL / 90 Ohm 1/10W 1% Thick Film General Purpose 0603 Chip Resistor", Manufacturer=Panasonic, Part Number=ERJ-3GEYJ121V
R5 R6: library part RT-0R00-F-1/10W-0603, "RC0603JR-070RL /  / RES SMD 0 OHM 1% JUMPER 1/10W 0603", Manufacturer="Stackpole Electronics Inc", Manufacturer Part #=RMCF0603ZT0R00, ComponentLink1description=Datasheet, ComponentLink1URL=https://industrial.panasonic.com/ww/products/resistors/chip-resistors/general-purpose-chip-resistors/models/ERJ2GE0R00X, ComponentLink2description="Manufacturer Website", ComponentLink2URL=https://industrial.panasonic.com/ww/products/resistors/chip-resistors/general-purpose-chip-resistors/models/ERJ2GE0R00X, Distributor=Digikey, Distributor Part #=RMCF0603ZT0R00CT-ND, Part Description="0 Ohms Jumper 0.1W, 1/10W Chip Resistor 0603 (1608 Metric) Automotive AEC-Q200 Thick Film"
R7 R9 R12: library part CRGCQ0402J330R, "RC0603FR-1015RL / Res Thick Film 0603 15 Ohm 1% 0.1W(1/10W) ±100ppm/C Molded SMD Paper T/R", Case Code (Imperial)=0402, Case Code (Metric)=1005, Manufacturer="TE Connectivity", Max Operating Temperature=155°C, Max Power Dissipation=63mW, Min Operating Temperature=-55°C, Ratings=AEC-Q200, Resistance=15R, Temperature Coefficient=100ppm/°C, Tolerance=5%, Case/Package=0402, Category="Chip SMD Resistors", ComponentLink1description=https://4donline.ihs.com/images/VipMasterIC/IC/TYEL/TYEL-S-A0004929575/TYEL-S-A0004929575-1.pdf?hkey=52A5661711E402568146F3353EA87419&src-supplier=Newark, ComponentLink1URL=https://4donline.ihs.com/images/VipMasterIC/IC/TYEL/TYEL-S-A0004929575/TYEL-S-A0004929575-1.pdf?hkey=52A5661711E402568146F3353EA87419&src-supplier=Newark, ComponentLink2description=https://www.te.com/commerce/DocumentDelivery/DDEController?Action=srchrtrv&amp;DocNm=1773204-3&amp;DocType=DS&amp;DocLang=English&src-supplier=Digi-Key, ComponentLink2URL=https://www.te.com/commerce/DocumentDelivery/DDEController?Action=srchrtrv&amp;DocNm=1773204-3&amp;DocType=DS&amp;DocLang=English&src-supplier=Digi-Key, ComponentLink3Description=https://4donline.ihs.com/images/VipMasterIC/IC/TYEL/TYEL-S-A0004929575/TYEL-S-A0004929575-1.pdf?hkey=52A5661711E402568146F3353EA87419&src-supplier=Farnell, ComponentLink3URL=https://4donline.ihs.com/images/VipMasterIC/IC/TYEL/TYEL-S-A0004929575/TYEL-S-A0004929575-1.pdf?hkey=52A5661711E402568146F3353EA87419&src-supplier=Farnell, Features="Moisture Resistant,Automotive AEC-Q200", Manufacturer Part Number=CRGCQ0402J330R, Number of Terminations=2, Packaging="Cut Tape", Pricing="1=0.0576, 10=0.0086, 100=0.0034, 250=0.0033, 500=0.0032, 1000=0.0018, 3000=0.0017, 6000=0.0016, 15000=0.0015 (USD)", RoHS=Yes, RoHS Compliant=Yes, Series=CRGCQ, Stock=20410, Supplier 1="Arrow Electronics", Supplier Part Number 1=CRGCQ0402J330R
R8 R10 R14: library part ERJ-3GEYJ103V, "ERA-3AED1650V / Res Thin Film 0603 165 Ohm 0.5% 1/10W 25ppm/C Molded SMD SMD Punched Carrier T/R", Manufacturer="Panasonic Electronic Components", Operating Temperature="-55°C ~ 155°C", Package="0603 (1608 Metric)", Power  (W)=0.1W, Resistance=165R, Supplier Part Number 1=P10KGCT-ND, Temperature Coefficient=±200ppm/°C, Tolerance=±5%, ComponentLink1description=Datasheet, ComponentLink1URL=https://industrial.panasonic.com/cdbs/www-data/pdf/RDA0000/DMA0000COL11.pdf, ComponentLink2description="Land Pattern", ComponentLink2URL=https://industrial.panasonic.com/cdbs/www-data/pdf/RDA0000/DMA0000COL17.pdf, Composition="Thick Film", Manufacturer Part Number=ERJ-3GEYJ103V, Supplier 1=Digi-Key
R11 R13 R16: "Res Thick Film 0603 1K Ohm 1% 1/10W ±100ppm/°C Molded SMD SMD Paper T/R", Case Code (Imperial)=0603, Case Code (Metric)=1608, Manufacturer=Yageo, Max Operating Temperature=155°C, Max Power Dissipation=100mW, Min Operating Temperature=-55°C, Resistance=1kR, Resistance Tolerance=1%, Resistor Type="Thick Film", Supplier Part Number 1=4016291, Temperature Coefficient=100ppm/°C, Voltage Rating=50V, Case/Package=0603, Category="Chip SMD Resistors", ComponentLink1description=https://datasheet.ciiva.com/11808/0900766b80f96399-11808081.pdf?src-supplier=Rs, ComponentLink1URL=https://datasheet.ciiva.com/11808/0900766b80f96399-11808081.pdf?src-supplier=Rs, ComponentLink2description=https://datasheet.ciiva.com/7746/1686128-7746280.pdf?src-supplier=Element14, ComponentLink2URL=https://datasheet.ciiva.com/7746/1686128-7746280.pdf?src-supplier=Element14, ComponentLink3Description=https://datasheet.ciiva.com/7660/1868787-7660790.pdf?src-supplier=Element14, ComponentLink3URL=https://datasheet.ciiva.com/7660/1868787-7660790.pdf?src-supplier=Element14, ComponentLink4Description=https://datasheet.ciiva.com/7983/443971-7983613.pdf?src-supplier=Element14, ComponentLink4URL=https://datasheet.ciiva.com/7983/443971-7983613.pdf?src-supplier=Element14, ComponentLink5Description=https://datasheet.ciiva.com/7746/1738695-7746281.pdf?src-supplier=Element14, ComponentLink5URL=https://datasheet.ciiva.com/7746/1738695-7746281.pdf?src-supplier=Element14, ComponentLink6Description=https://datasheet.ciiva.com/7746/1738695-7746279.pdf?src-supplier=Element14, ComponentLink6URL=https://datasheet.ciiva.com/7746/1738695-7746279.pdf?src-supplier=Element14, ComponentLink7Description=https://datasheet.ciiva.com/8896/pyu-rc0603-51-rohs-l-4-8896106.pdf?src-supplier=Avnet, ComponentLink7URL=https://datasheet.ciiva.com/8896/pyu-rc0603-51-rohs-l-4-8896106.pdf?src-supplier=Avnet, ComponentLink8Description=https://datasheet.ciiva.com/15189/getdatasheetpartid-404327-15189644.pdf?src-supplier=Verical, ComponentLink8URL=https://datasheet.ciiva.com/15189/getdatasheetpartid-404327-15189644.pdf?src-supplier=Verical, Construction=Rectangular, Contact Plating=Tin,Matte, Depth=0.8mm, Features="Moisture Resistant", Height=0.45mm, Lead Free="Lead Free", Length=1.6mm, Manufacturer Part Number=RC0603FR-071KL, Military Standard=Not, Number of Terminations=2, Packaging="Tape and Reel", Power Rating=100mW, Pricing="5000=0.0015, 50000=0.0014, 200000=0.0014, 625000=0.0013, 2000000=0.0012 (USD)", Reach SVHC Compliant=No, RoHS=Yes, RoHS Compliant=Yes, Series=RC, Size Code=0603, Stock=11600000, Supplier 1="Future Electronics", Technology="THICK FILM", Termination=SMD/SMT, Tolerance=1%
R15: library part CRGCQ0402J330R, "RC0603FR-07330RL /  / 100Mw Thick Film Resistors 100Ppm/ 1% 330 0603 Chip Resistor Surface Mount Rohs", Case Code (Imperial)=0402, Case Code (Metric)=1005, Manufacturer="TE Connectivity", Max Operating Temperature=155°C, Max Power Dissipation=63mW, Min Operating Temperature=-55°C, Ratings=AEC-Q200, Resistance=330R, Temperature Coefficient=100ppm/°C, Tolerance=5%, Case/Package=0402, Category="Chip SMD Resistors", ComponentLink1description=https://4donline.ihs.com/images/VipMasterIC/IC/TYEL/TYEL-S-A0004929575/TYEL-S-A0004929575-1.pdf?hkey=52A5661711E402568146F3353EA87419&src-supplier=Newark, ComponentLink1URL=https://4donline.ihs.com/images/VipMasterIC/IC/TYEL/TYEL-S-A0004929575/TYEL-S-A0004929575-1.pdf?hkey=52A5661711E402568146F3353EA87419&src-supplier=Newark, ComponentLink2description=https://www.te.com/commerce/DocumentDelivery/DDEController?Action=srchrtrv&amp;DocNm=1773204-3&amp;DocType=DS&amp;DocLang=English&src-supplier=Digi-Key, ComponentLink2URL=https://www.te.com/commerce/DocumentDelivery/DDEController?Action=srchrtrv&amp;DocNm=1773204-3&amp;DocType=DS&amp;DocLang=English&src-supplier=Digi-Key, ComponentLink3Description=https://4donline.ihs.com/images/VipMasterIC/IC/TYEL/TYEL-S-A0004929575/TYEL-S-A0004929575-1.pdf?hkey=52A5661711E402568146F3353EA87419&src-supplier=Farnell, ComponentLink3URL=https://4donline.ihs.com/images/VipMasterIC/IC/TYEL/TYEL-S-A0004929575/TYEL-S-A0004929575-1.pdf?hkey=52A5661711E402568146F3353EA87419&src-supplier=Farnell, Features="Moisture Resistant,Automotive AEC-Q200", Manufacturer Part Number=CRGCQ0402J330R, Number of Terminations=2, Packaging="Cut Tape", Pricing="1=0.0576, 10=0.0086, 100=0.0034, 250=0.0033, 500=0.0032, 1000=0.0018, 3000=0.0017, 6000=0.0016, 15000=0.0015 (USD)", RoHS=Yes, RoHS Compliant=Yes, Series=CRGCQ, Stock=20410, Supplier 1="Arrow Electronics", Supplier Part Number 1=CRGCQ0402J330R
U1: library part MAX31855-S8+4_1, "Cold Junction Compensated Thermocouple to Digital Converter, 14 Bits Temperature Resolution, -40 to 125 degC, 8-Pin SOIC (S8+4), Pb-Free, Tape ang Reel", Generic Part Number=MAX31855, Code_JEDEC=MS-012, ComponentLink1description="Manufacturer URL", ComponentLink1URL=http://www.maximintegrated.com/, ComponentLink2description=Datasheet, ComponentLink2URL=http://datasheets.maximintegrated.com/en/ds/MAX31855.pdf, ComponentLink3Description="Package Specification", ComponentLink3URL=http://pdfserv.maximintegrated.com/package_dwgs/21-0041.PDF, DatasheetVersion="Rev. 2", Functions="Thermocouple-to-Digital Converter", Interface=SPI, Mounting Technology="Surface Mount", PackageDescription="8-Pin Small-Outline IC, Narrow, Body 3.9 x 4.9 mm, Pitch 1.27 mm", PackageReference=S8+4, PackageVersion="Rev. D, 10/2012", Packing="Tape ang Reel", Parasite Pwr.=No, PartNumber=MAX31855KASA+T
U2: "3.3V, Full-Duplex RS-485, 16kV IEC ESD, 50Mbps data rate, No Enables 8-SOIC -40 to 125", Mfr_Name="Texas Instruments", Copyright="Copyright (C) 2022 Ultra Librarian. All rights reserved.", Manufacturer_Part_Number=SN65HVD1477DR, RefDes=RefDes, Type=DEV
U3: "IC MCU 32BIT 1MB FLASH 64LQFP", Manufacturer=STMicroelectronics, Operating Temperature="-40°C ~ 85°C (TA)", Package / Case=64-LQFP, Supplier Part Number 1=497-11767-ND, Voltage - Supply (VDD)="1.8V ~ 3.6V", ComponentLink1description=Datasheet, ComponentLink1URL=https://www.st.com/content/ccc/resource/technical/document/datasheet/ef/92/76/6d/bb/c2/4f/f7/DM00037051.pdf/files/DM00037051.pdf/jcr:content/translations/en.DM00037051.pdf, Connectivity="CANbus, I²C, IrDA, LINbus, SPI, UART/USART, USB OTG", Core Processor="ARM® Cortex®-M4", Core Size=32-Bit, Data Converters="A/D 16x12b; D/A 2x12b", Manufacturer Part Number=STM32F405RGT6, Mounting Type="Surface Mount", Number of I/O=51, Oscillator Type=Internal, Peripherals="Brown-out Detect/Reset, DMA, I²S, LCD, POR, PWM, WDT", Program Memory Size="1MB (1M x 8)", Program Memory Type=FLASH, RAM Size="192K x 8", Speed=168MHz, Supplier 1=Digi-Key
U4 U5 U6: library part c8a8c153b9e84e05c1733c8ea85bdd9, "TSZ181ILT /  / Very high accuracy (25 &#181;V) high bandwidth (3 MHz) zero drift 5 V operational amplifiers", Case/Package=SOT-23, Input Bias Current=1pA, Input Offset Voltage (Vos)=4.5mV, Max Operating Temperature=85°C, Max Supply Voltage=6V, Min Operating Temperature=-40°C, Min Supply Voltage=1.8V, Nominal Supply Current=100uA, Operating Supply Voltage=5.5V, Output Current=23mA, Package Quantity=1, Power Supply Rejection Ratio (PSRR)=86dB, Voltage Gain=112dB, Bandwidth=1MHz, Common Mode Rejection Ratio=60dB, Contact Plating=Tin, Gain Bandwidth Product=1MHz, Height=1.3mm, Lead Free="Lead Free", Length=3.1mm, Mount="Surface Mount", Number of Amplifiers=1, Number of Channels=1, Number of Circuits=1, Number of Elements=1, Number of Pins=5, Operating Supply Current=100uA, Output Current per Channel=23mA, Packaging="Tape and Reel", Radiation Hardening=No, REACH SVHC="No SVHC", Slew Rate=0.6V/µs, Unity Gain Bandwidth Product=1MHz, Voltage=6V, Width=1.8mm
Y1: library part CMP-25149-000010-1, "MEMS OSC XO 8.0000MHZ LVCM LVTTL"

## Free pads (board coordinates)
  round 128.5 hole 128.5: MH(395.13,1812.4) MH(395.13,3266.6) MH(1426.4,784.13) MH(2877.6,784.13) MH(3905.41,3266.6) MH(3905.87,1812.4)

## Nets (pads, with @x,y where several pads share a name; then routed paths per layer and width w, separated by ;. In a path a pad name is that pad's centre, name@x,y a point inside that pad or via, vN(x,y) a via of type N, cw(c..) or ccw(c..) an arc to the next point about the centre after c; other vN are vias at no path point)
+3V3: C4.1 C5.1 C6.1 C9.1 C14.1 C15.1 C16.1 C17.1 C18.1 C19.1 C20.1 C21.1 J3.6 J6.2 R1.2 R3.2 R15.1 U1.U4 U2.1 U3.1 U3.13 U3.19 U3.32 U3.48 U3.64 U4.5 U5.5 U6.5
+12: J1.1 J2.1 J3.4 J4.1 R16.1
CONDUIT_RX: R5.1 U3.43
CONDUIT_TX: R6.1 U3.42
DEBUG_RX: J6.7 U3.29
DEBUG_TX: J6.5 U3.30
GND: C2.2 C3.1 C4.2 C5.2 C6.2 C7.2 C8.2 C9.2 C10.2 C11.2 C12.1 C13.2 C14.2 C15.2 C16.2 C17.2 C18.2 C19.2 C20.2 C21.2 C22.2 C23.2 D1.A D2.A D3.1 D4.1 D5.1 D6.1 J1.S2 J2.S2 J3.3 J3.5 J3.7 J3.S1 J3.S2 J4.S2 J5.2 J5.S2 J6.3 J6.6 J7.2 J7.S2 J8.S1 J8.S2 R8.1 R10.1 R14.1 U1.U1 U2.4 U3.12 U3.18 U3.60 U3.63 U4.2 U5.2 U6.2 Y1.1 Y1.2
NetC3_2: C3.2 R3.1 Y1.4
NetC12_2: C12.2 U3.31
NetC13_1: C13.1 U3.47
NetD3_2: D3.2 R11.2
NetD4_2: D4.2 R13.2
NetD5_2: D5.2 R15.2
NetD6_2: D6.2 R16.2
NetR1_1: R1.1 R5.2 U2.2
NetR2_2: R2.2 Y1.3
NetR6_2: R6.2 U2.3
NetR7_1: R7.1 U4.1 U4.4
NetR9_1: R9.1 U5.1 U5.4
NetR12_1: R12.1 U6.1 U6.4
NRST: J6.10 U3.7
OSC_IN: R2.1 U3.5
PT15_ADC: C7.1 R7.2 U3.16
PT15_OUT: C8.1 J1.2 R8.2 U4.3
PT16_ADC: C10.1 R9.2 U3.25
PT16_OUT: C11.1 J2.2 R10.2 U5.3
PT17_ADC: C22.1 R12.2 U3.40
PT17_OUT: C23.1 J4.2 R14.2 U6.3
RX_N: J3.10 R4.1 U2.7
RX_P: J3.11 R4.2 U2.8
"SOL10 PWR": D1.C J3.1 J5.1 R11.1
"SOL11 PWR": D2.C J3.2 J7.1 R13.1
SPI1_MISO: U1.U7 U3.22
SPI1_SCK: U1.U5 U3.21
SWCLK: J6.4 U3.49
SWDIO: J6.8 U3.46
SWO: J6.12 U3.55
"TC10 V+": C1.1 J8.P U1.U3
"TC10 V-": C1.2 J8.N U1.U2
TC10_CS!: U1.U6 U3.23
TX_N: J3.9 U2.6
TX_P: J3.8 U2.5
pads on no net: C2.1 J1.S1 J2.S1 J4.S1 J5.S1 J6.1 J6.9 J6.11 J7.S1 U1.U8 U3.2 U3.3 U3.4 U3.6 U3.8 U3.9 U3.10 U3.11 U3.14 U3.15 U3.17 U3.20 U3.24 U3.26 U3.27 U3.28 U3.33 U3.34 U3.35 U3.36 U3.37 U3.38 U3.39 U3.41 U3.44 U3.45 U3.50 U3.51 U3.52 U3.53 U3.54 U3.56 U3.57 U3.58 U3.59 U3.61 U3.62

## Silkscreen, mask and mechanical layers (free items; w line width, h text height)
Mechanical 1:
  the board outline again, w0.5

## Text inside footprints (layer, text, board x,y; h text height)
U2: Top 3D Body "*" at 7289,4225.5 h50
U4: Top Overlay "*" at 5839.75,3197.4 h50; Top 3D Body "*" at 5883,3154.4 h50
U5: Top Overlay "*" at 8529.75,1967.4 h50; Top 3D Body "*" at 8573,1924.4 h50
U6: Top Overlay "*" at 4839.75,4237.4 h50; Top 3D Body "*" at 4883,4194.4 h50